# Altium PCB CuC_PCB.PcbDoc (part 2 of 4)
Units mm, origin at the board's own origin, x right, y up, seen from the top; angles counter-clockwise.
Board outline 203.71 x 204.22 mm, 2 copper layers (Top Layer, Bottom Layer); 421 components, 374 nets, 1366 pads, 155 vias.
Unrouted connection lines stored in the file: 2.
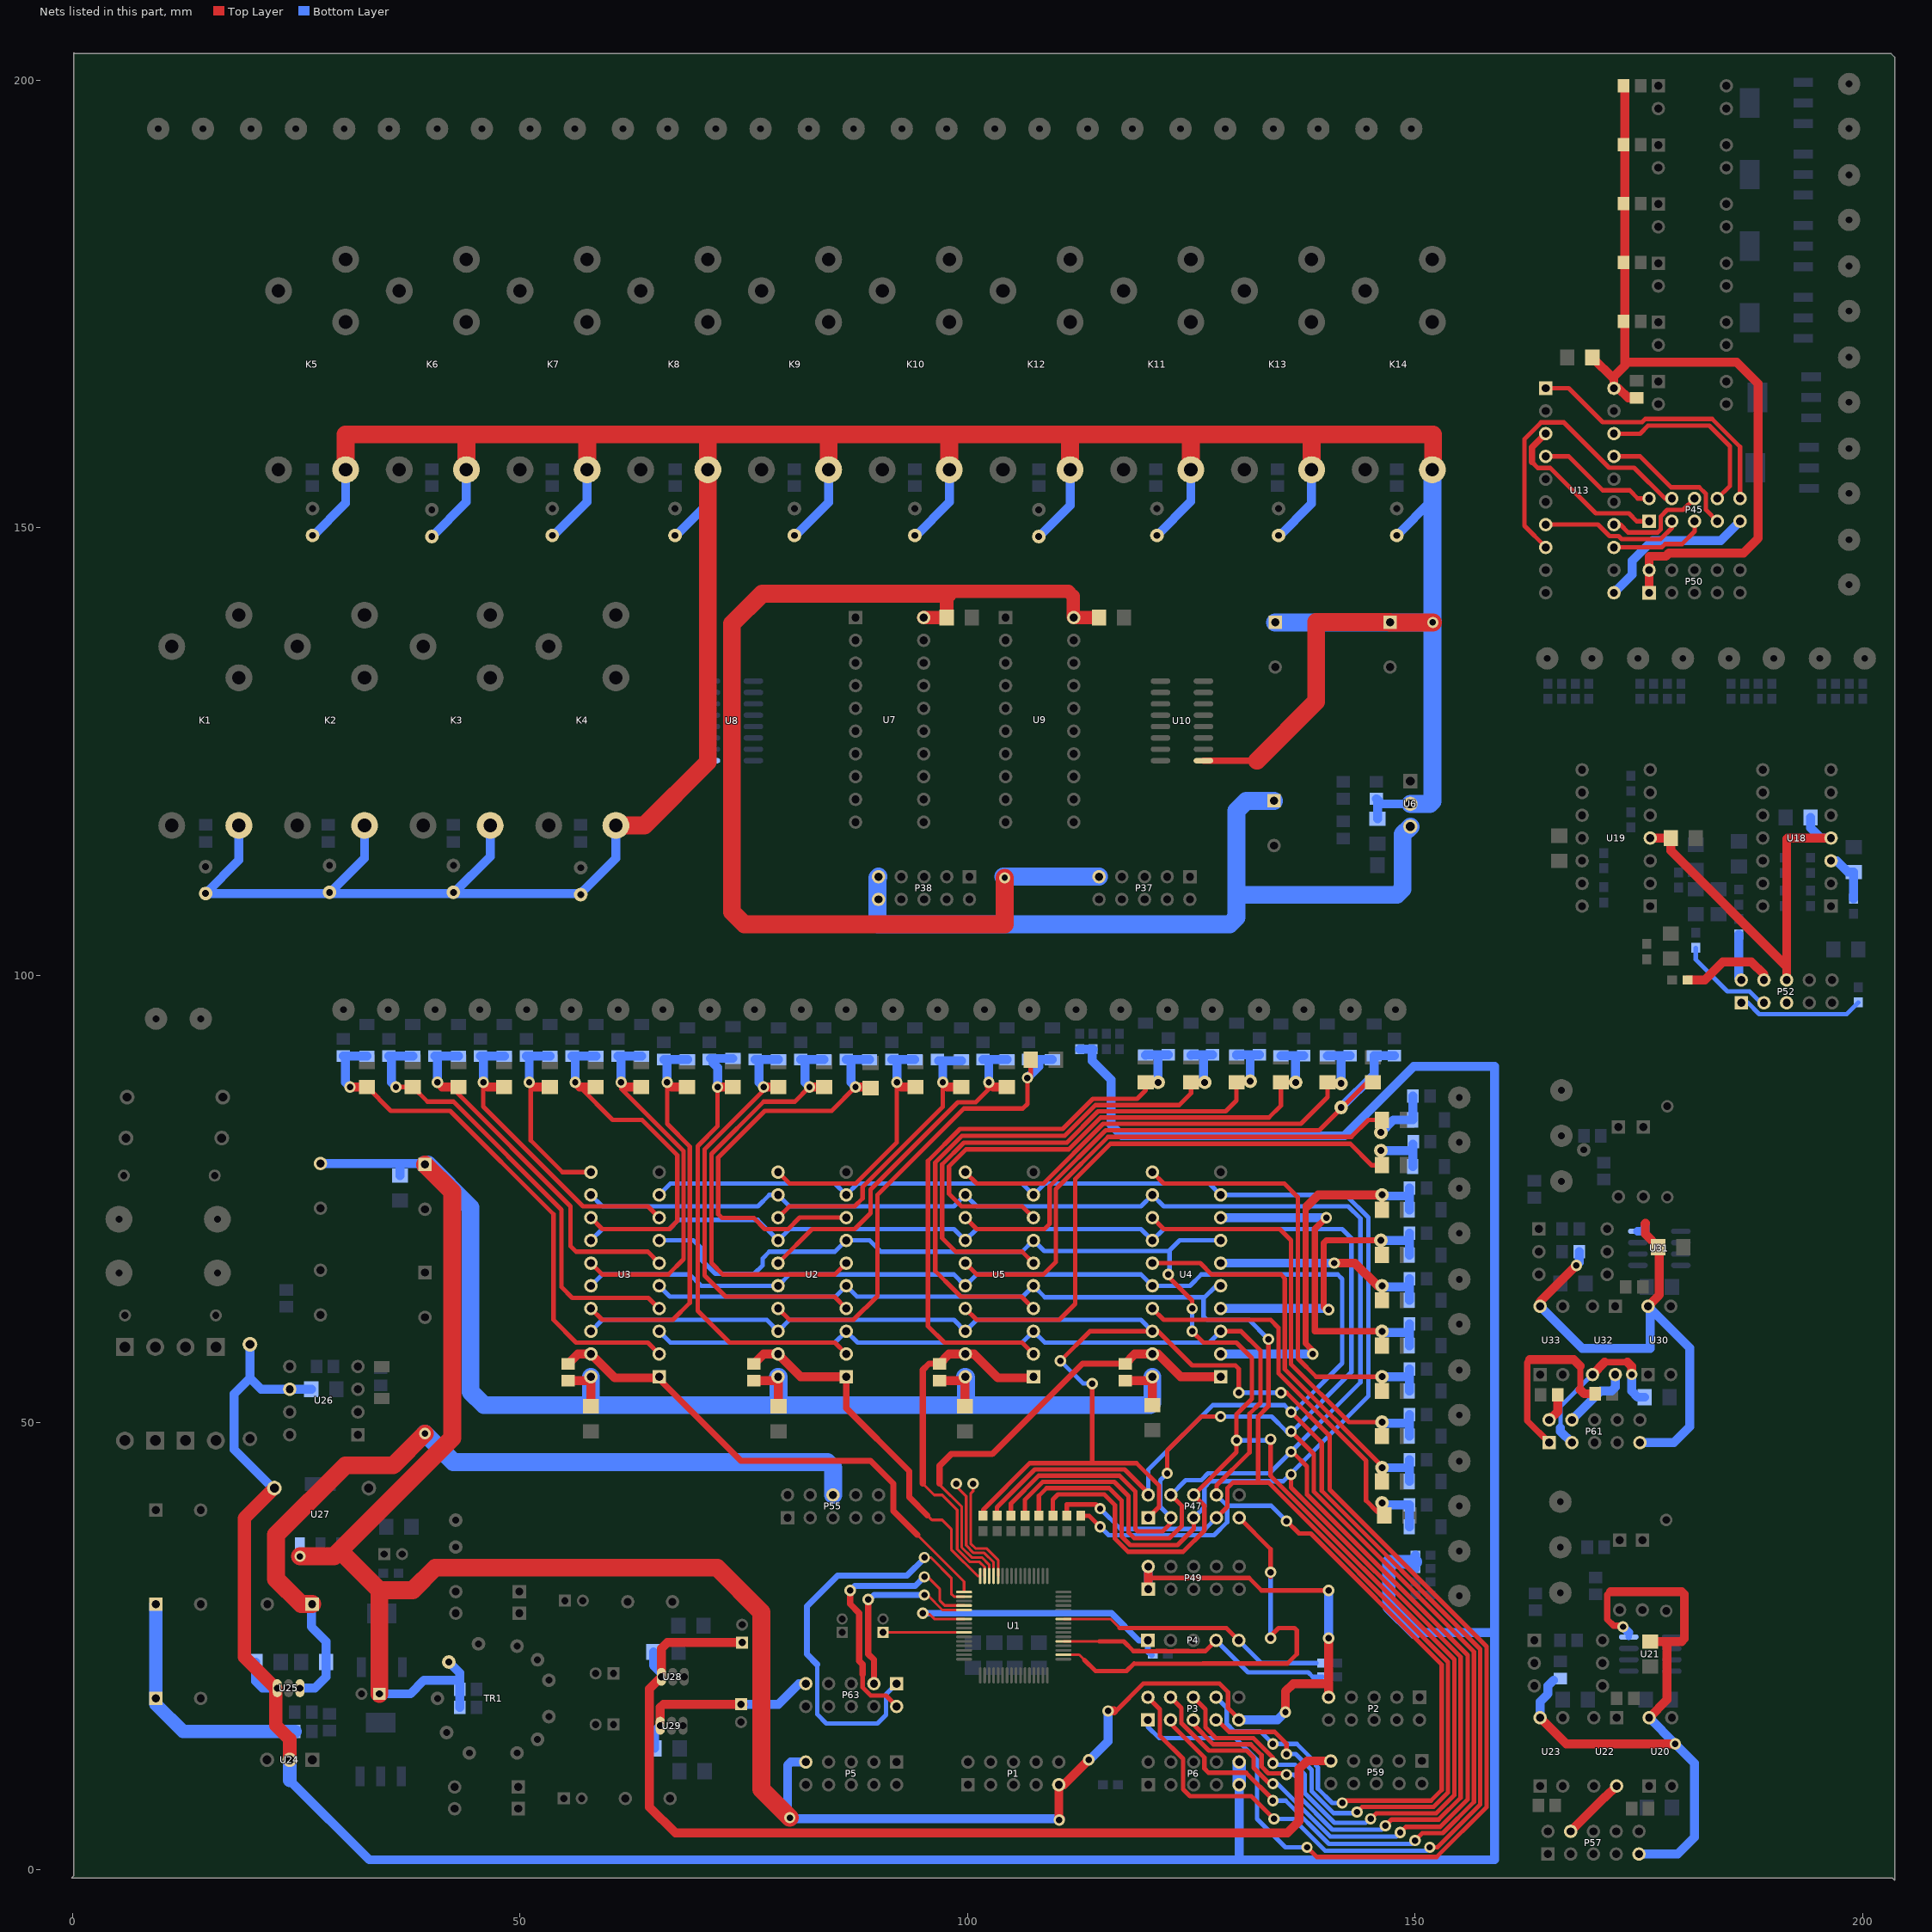
[diagram p2: the nets of this part, all layers, seen from the top]

## Via types
v1: diameter 1.27, hole 0.711, Top Layer to Bottom Layer, 155 vias

## Nets (pads, with @x,y where several pads share a name; then routed paths per layer and width w, separated by ;. In a path a pad name is that pad's centre, name@x,y a point inside that pad or via, vN(x,y) a via of type N, cw(c..) or ccw(c..) an arc to the next point about the centre after c; other vN are vias at no path point) (continued)
+3V3_CTRL: P61.4 U32.4 | length 7.8
  Bottom Layer w1: P61.4@167.513,50.292 170.764,53.543 171.928,53.543 172.36,53.975 U32.4@172.36,55.372
+3V3_RS: P57.4 U22.4 | length 7.2
  Top Layer w1: P57.4@167.386,4.318 171.196,8.128 171.238,8.128 U22.4@172.508,9.398
+5V: C7.1 C8.1 C25.1 C26.1 C71.1 C72.2 C77.1 L3.2 P1.9 P2.9 P3.9 P5.9 P49.1 P49.2 R13.2 R14.2 R39.2 R40.2 R134.1 R135.2 TR1.4 U2.20 U3.20 U4.20 U5.20 U27.3 | length 434.9
  Top Layer w0.5: 116.332,17.78 116.586,17.78 119.634,20.828 128.143,20.828 129.102,19.869 129.102,18.091 P3.9@130.429,16.764 ; 120.184,32.766 120.311,32.639 131.445,32.639 132.842,31.242 v1(140.335,31.242) v1@140.606,31.242
  Top Layer w1: R14.2@55.372,54.676 57.47,54.676 U3.20@57.912,55.118 C25.1@57.912,51.819 ; R13.2@76.115,54.676 78.383,54.676 U2.20@78.825,55.118 78.867,55.076 C26.1@78.867,51.819 ; R40.2@96.859,54.676 99.295,54.676 99.695,55.076 C8.1@99.695,51.819 ; v1(110.236,5.588) 110.363,5.715 110.194,5.884 P1.9@110.194,9.525 110.744,9.525 v1(113.538,12.319) ; v1(115.697,17.78) 116.332,17.78 ; R39.2@117.602,54.676 120.208,54.676 U4.20@120.65,55.118 C7.1@120.65,51.946 ; P49.1@120.184,31.369 120.184,32.766 P49.2@120.184,33.909 ; v1(135.509,17.653) 135.509,19.939 136.398,20.828 140.335,20.828 ; P2.9@140.335,19.304 140.335,20.828 ; v1@140.335,25.654 140.335,20.828
  Top Layer w2: v1(25.4,35.052) 29.21,35.052 42.418,48.26 42.418,75.779 C71.1@39.37,78.827 ; 30.48,35.052 34.274,31.258 ; C77.1@34.274,19.685 34.274,31.258 ; v1(80.137,5.842) 76.962,9.017 76.962,28.829 72.009,33.782 40.513,33.782 37.989,31.258 34.274,31.258
  Bottom Layer w1: L3.2@27.686,78.954 36.576,78.954 ; C77.1@34.274,19.685 37.719,19.685 39.243,21.209 43.246,21.209 ; C72.2@36.576,77.6 36.576,78.954 ; C71.1@39.37,78.827 39.243,78.954 36.576,78.954 ; TR1.4@42.037,23.241 43.246,22.032 43.246,21.209 ; R135.2@43.246,18.161 R134.1@43.246,20.193 43.246,21.209 ; P5.9@81.915,12.065 80.264,12.065 79.883,11.684 79.883,5.842 80.01,5.715 110.363,5.715 v1(110.236,5.588) ; v1(113.538,12.319) 113.626,12.319 115.697,14.39 v1(115.697,17.78) ; P49.1@120.184,31.369 P49.2@120.184,33.909 ; P3.9@130.302,16.764 134.62,16.764 v1(135.509,17.653) ; v1(140.335,25.908) v1(140.335,31.242)
  Bottom Layer w2: C71.1@39.37,78.827 39.664,78.827 44.45,74.041 44.45,53.467 45.974,51.943 57.912,51.943 ; U3.20@57.912,55.118 57.912,51.943 ; U2.20@78.825,55.118 78.867,55.076 78.867,51.943 ; U5.20@99.737,55.118 99.822,55.033 99.822,51.943 ; U4.20@120.65,55.118 120.65,52.197 120.396,51.943 99.822,51.943 ; 57.912,51.943 78.867,51.943 ; 78.867,51.943 99.822,51.943
+5V_CL: C84.2 C86.1 P63.9 U29.1 | length 22.2
  Top Layer w1: U29.1@65.659,16.129 65.659,18.161 66.024,18.526 C86.1@74.93,18.526
  Bottom Layer w1: C84.2@65.021,13.589 65.021,15.491 U29.1@65.659,16.129 ; C86.1@74.93,18.526 78.851,18.526 81.153,20.828 P63.9@81.915,20.828
+5V_CL2: C88.2 P61.9 R146.2 U30.4 U31.8 U33.4 | length 60.5
  Top Layer w1: U33.4@163.957,62.992 163.957,63.5 v1(168.021,67.564) ; 175.692,72.187 175.717,72.212 ; U30.4@176.022,62.992 177.292,64.262 177.292,69.466 C88.2@177.162,69.596 175.717,71.041 175.717,72.212 ; 175.717,72.212 175.768,72.263 175.717,72.263 175.717,72.212
  Bottom Layer w1: U33.4@163.957,62.992 168.656,58.293 176.276,58.293 U30.4@176.276,62.738 ; v1(168.021,67.564) 168.336,67.879 R146.2@168.336,69.088 ; U31.8@174.892,71.374 175.692,71.374 175.692,72.187 ; P61.9@175.133,47.752 178.892,47.752 180.67,49.53 180.67,58.344 U30.4@176.276,62.738 ; U30.4@176.022,62.992 U30.4@176.276,62.738
+5V_COM: C79.2 C81.1 P59.9 U28.1 | length 114.9
  Top Layer w1: C81.1@74.93,25.416 66.437,25.416 65.786,24.765 U28.1@65.786,21.59 64.459,20.263 64.459,7.042 67.359,4.142 135.714,4.142 137.033,5.461 137.033,11.303 137.922,12.192 P59.9@140.589,12.192
  Bottom Layer w1: C79.2@64.894,24.384 64.894,22.863 65.786,21.971 U28.1@65.786,21.59
+5V_DO: C50.1 P50.1 P50.2 R74.2 R75.2 R76.2 R77.2 R78.2 R79.2 U13.20 | length 91.1
  Top Layer w1: C50.1@169.802,169.001 172.212,166.591 ; R74.2@173.294,199.354 173.421,199.227 173.421,192.775 173.421,186.197 173.421,179.618 173.421,173.04 173.421,168.62 ; R79.2@174.752,164.495 173.797,164.495 172.72,165.572 U13.20@172.212,165.572 172.212,166.591 ; P50.1@176.149,142.712 P50.2@176.149,145.252 176.149,146.776 176.161,146.788 177.989,146.788 178.358,147.157 186.69,147.157 188.341,148.808 188.341,166.08 185.928,168.493 173.548,168.493 173.421,168.62 ; 172.212,166.591 172.212,166.903 173.421,168.112 173.421,168.62
+5V_O: C48.1 C49.1 P37.9 U7.20 U9.20 | length 129.7
  Top Layer w1.5: U7.20@95.096,139.954 C49.1@97.66,139.954 97.66,142.491 97.79,142.621 98.044,142.875 111.252,142.875 111.792,142.335 111.792,140.022 U9.20@111.86,139.954 C48.1@114.678,139.954
  Top Layer w2: 97.79,142.621 77.04,142.621 73.66,139.241 73.66,107.061 75.057,105.664 104.14,105.664 v1(104.14,110.871)
  Bottom Layer w2: v1(104.14,110.871) 104.013,110.998 P37.9@114.681,110.998
+5V_RS2: C61.2 P57.9 R122.2 U20.4 U21.8 U23.4 | length 77.1
  Top Layer w0.7: 171.831,31.115 171.475,30.759 171.475,28.003 172.174,27.305 v1@173.101,27.305
  Top Layer w1: U23.4@163.957,17.018 166.878,14.097 v1(179.07,14.097) ; 171.831,31.115 179.768,31.115 180.086,30.797 180.086,25.847 179.768,25.53 177.772,25.53 ; U20.4@176.149,17.018 178.156,19.025 178.156,25.146 177.772,25.53 ; C61.2@176.276,25.53 177.772,25.53
  Bottom Layer w0.7: U21.8@173.876,26.035 173.888,26.035 173.888,26.518
  Bottom Layer w1: U23.4@163.957,17.018 163.957,18.796 164.846,19.685 164.846,20.574 165.481,21.209 ; v1@173.177,27.229 173.888,26.518 ; P57.9@175.006,1.778 179.324,1.778 181.229,3.683 181.229,11.938 v1(179.07,14.097) U20.4@176.149,17.018
  other v1: 173.228,27.178
+12V_O: C45.2 C46.1 C47.1 D33.2 D34.2 D35.2 D36.2 D37.2 D38.2 D39.2 D40.2 D41.2 D42.2 D43.2 D44.2 D45.2 D46.2 K1.1 K2.1 K3.1 K4.1 K5.1 K6.1 K7.1 K8.1 K9.1 K10.1 K11.1 K12.1 K13.1 K14.1 R58.2 U6.2 U8.9 U10.9 | length 492
  Top Layer w0.7: U10.9@126.352,123.957 132.339,123.957
  Top Layer w2: K5.1@30.502,156.467 30.502,160.401 111.506,160.401 ; K6.1@43.994,156.467 43.994,160.326 ; K7.1@57.485,156.467 57.485,160.193 ; K4.1@60.699,116.716 63.884,116.716 70.976,123.808 K8.1@70.976,156.467 70.976,160.257 ; K9.1@84.467,156.467 84.467,160.389 ; K10.1@97.959,156.467 97.959,160.316 ; K12.1@111.45,156.467 111.45,160.345 111.506,160.401 ; K11.1@124.941,156.467 124.941,160.247 ; 132.339,123.957 138.938,130.556 138.938,139.446 141.351,139.446 ; K13.1@138.433,156.467 138.433,160.277 138.557,160.401 ; K14.1@151.924,156.467 152.019,156.562 152.019,160.401 138.557,160.401 ; v1(151.979,139.406) C46.1@147.193,139.406 ; 111.506,160.401 138.557,160.401 ; 141.351,139.446 C46.1@147.193,139.406 ; 141.351,139.446 147.153,139.446 C46.1@147.193,139.406
  Bottom Layer w1: K1.1@18.574,116.716 18.574,112.832 D33.2@14.859,109.117 D35.2@28.702,109.117 ; D37.2@26.797,148.995 30.502,152.7 K5.1@30.502,156.467 ; K2.1@32.616,116.716 32.616,113.031 28.765,109.18 D35.2@28.702,109.117 ; D38.2@40.132,148.995 43.994,152.857 K6.1@43.994,156.467 ; K3.1@46.657,116.716 46.657,113.229 42.608,109.18 D34.2@42.545,109.117 ; D39.2@53.594,148.995 53.657,149.058 57.485,152.886 K7.1@57.485,156.467 ; K4.1@60.699,116.716 60.699,113.047 56.769,109.117 D34.2@42.545,109.117 ; K4.1@60.96,116.586 63.627,116.586 70.998,123.957 U8.9@71.26,123.957 ; D40.2@67.31,148.995 67.373,149.058 70.976,152.661 K8.1@70.976,156.467 ; D41.2@80.645,148.995 80.709,149.058 84.467,152.817 K9.1@84.467,156.467 ; D42.2@94.107,148.995 97.959,152.847 K10.1@97.959,156.467 ; D43.2@107.95,148.995 111.45,152.495 K12.1@111.45,156.467 ; D44.2@121.031,148.995 D44.2@121.158,149.122 124.941,152.905 K11.1@124.941,156.467 ; D45.2@134.747,148.995 138.433,152.681 K13.1@138.433,156.467 ; R58.2@145.669,119.7 R58.2@145.796,119.573 ; C45.2@145.796,117.478 R58.2@145.796,119.573 ; D46.2@147.828,148.995 D46.2@147.955,149.122 151.924,153.091 ; U6.2@149.479,119.126 146.243,119.126 R58.2@145.796,119.573 ; D35.2@28.702,109.117 D34.2@42.545,109.117
  Bottom Layer w2: C47.1@134.366,139.406 C46.1@147.193,139.406 v1@151.924,139.406 ; U6.2@149.479,119.126 151.638,119.126 151.924,119.412 v1@151.924,139.425 ; K14.1@151.924,156.467 151.924,153.091 v1@151.924,139.425 ; v1(151.979,139.406) 152.019,139.446 v1@151.924,139.425
+15V: C65.1 C69.2 P55.6 U25.1 | length 94
  Top Layer w2: C65.1@26.757,29.718 25.527,29.718 22.733,32.512 22.733,37.465 30.48,45.212 35.814,45.212 v1(39.37,48.768)
  Bottom Layer w1: U25.1@25.4,20.32 27.051,20.32 28.324,21.593 C69.2@28.324,23.241 28.324,25.524 26.67,27.178 26.67,29.631 C65.1@26.757,29.718
  Bottom Layer w2: v1(39.37,48.768) 42.545,45.593 84.328,45.593 84.963,44.958 P55.6@84.963,41.91
+15V_AN: C55.1 C58.1 P52.6 U18.4 U19.4 | length 46.7
  Top Layer w1: U19.4@176.276,115.316 C58.1@178.559,115.316 178.559,113.922 191.516,100.965 ; P52.6@191.516,99.441 191.516,100.965 ; U18.4@196.469,115.316 191.643,115.316 191.516,115.189 191.516,100.965
  Bottom Layer w1: C55.1@194.186,117.602 194.186,116.456 195.326,115.316 U18.4@196.469,115.316
+24V: C63.1 C64.1 C66.2 C70.2 P6.9 P6.10 R31.2 R32.2 R33.2 R34.2 R125.1 R129.1 R130.1 U24.2 U25.3 U26.6 | length 421.1
  Top Layer w1.5: R129.1@22.538,42.672 19.177,39.311 19.177,23.823 22.68,20.32 22.68,16.182 24.257,14.605 U24.2@24.257,12.319
  Bottom Layer w1: R130.1@19.812,58.742 19.812,54.991 ; C66.2@20.444,23.241 20.444,21.085 21.209,20.32 U25.3@22.86,20.32 22.86,15.494 ; R129.1@22.538,42.672 22.352,42.672 18.034,46.99 18.034,53.213 19.812,54.991 ; 24.257,10.033 33.147,1.143 130.302,1.143 ; C70.2@26.667,53.721 U26.6@24.257,53.721 21.082,53.721 19.812,54.991 ; R31.2@112.522,91.733 R32.2@114.004,91.733 ; R32.2@113.919,91.733 113.919,90.424 116.014,88.328 116.014,83.248 117.221,82.042 142.113,82.042 149.86,89.789 158.877,89.789 158.877,1.143 130.344,1.143 P6.9@130.344,9.525 ; 149.987,26.543 158.877,26.543 ; R34.2@150.026,33.697 150.026,34.438 R33.2@150.026,35.179
  Bottom Layer w1.5: C63.1@9.311,29.718 C64.1@9.311,19.177 9.311,18.502 12.319,15.494 22.86,15.494 R125.1@24.831,15.494 24.257,14.92 U24.2@24.257,12.319 24.257,10.033 ; P6.9@130.344,9.525 P6.10@130.344,12.065 ; 149.987,26.543 147.066,29.464 147.066,34.417 147.087,34.438 150.026,34.438
+24V_O: C43.1 C44.2 P38.9 P38.10 U6.3 | length 88.6
  Bottom Layer w2: P38.9@90.043,110.998 89.916,110.871 89.916,105.664 129.286,105.664 130.048,106.426 130.048,108.966 ; C43.1@134.239,119.467 131.151,119.467 130.048,118.364 130.048,108.966 ; U6.3@149.479,116.586 148.593,115.7 C44.2@148.593,112.268 148.593,109.604 147.955,108.966 130.048,108.966
AN_PWM0: P52.1 R82.2 | length 14.1
  Bottom Layer w0.5: P52.1@186.436,96.901 187.203,96.901 188.457,95.647 198.224,95.647 R82.2@199.517,96.94
AN_PWM1: P52.2 R90.2 | length 5.2
  Bottom Layer w1: R90.2@186.182,104.56 186.182,99.695 P52.2@186.436,99.441
AN_PWM2: P52.3 R98.2 | length 10.9
  Bottom Layer w0.5: R98.2@181.356,103.036 181.356,101.727 184.896,98.187 187.363,98.187 188.649,96.901 P52.3@188.976,96.901
AN_PWM3: P52.4 R106.2 | length 10.6
  Top Layer w1: R106.2@180.428,99.441 182.372,99.441 184.404,101.473 187.579,101.473 188.976,100.076 P52.4@188.976,99.441
AN_PWM4: P52.5
CTRL_DATA_DIR: P63.1 U1.2 | length 48
  Top Layer w0.3: v1@95.25,34.925 95.885,34.925 98.171,32.639 98.171,30.861 98.477,30.555 U1.2@99.606,30.555
  Bottom Layer w0.5: 83.185,22.987 83.185,17.399 84.201,16.383 89.916,16.383 90.875,17.342 90.875,19.628 P63.1@92.075,20.828
  Bottom Layer w0.7: 83.185,22.987 82.042,24.13 82.042,29.464 85.471,32.893 93.218,32.893 95.25,34.925 v1@95.25,35.179
  other v1: 95.165,34.925
CTRL_DATA_DIR2: P61.1 R136.2 | length 20.8
  Top Layer w0.7: 162.814,57.023 162.525,56.734 162.525,50.2 P61.1@164.973,47.752 ; 168.453,53.657 168.453,56.312
  Top Layer w1: 162.814,57.023 167.742,57.023 168.453,56.312 ; 168.453,53.657 168.897,53.213 R136.2@170.119,53.213
CTRL_RX: P63.3 U1.5 | length 21
  Top Layer w0.3: v1(95.165,30.734) 95.504,30.734 97.183,29.055 U1.5@99.606,29.055
  Top Layer w0.7: v1(88.9,30.226) 88.9,24.13 89.535,23.495 P63.3@89.535,20.828
  Bottom Layer w0.7: v1@89.154,30.353 89.535,30.734 v1(95.165,30.734)
CTRL_RX2: P61.3 R140.1 U32.3 | length 19.3
  Top Layer w0.7: 171.191,56.744 173.736,56.744
  Top Layer w1: U32.3@169.82,55.372 171.191,56.744 ; 173.736,56.744 174.193,56.286 v1(174.193,55.372)
  Bottom Layer w0.5: 166.243,49.403 166.243,51.795 U32.3@169.82,55.372
  Bottom Layer w1: 166.243,49.403 166.243,49.022 P61.3@167.513,47.752 ; v1(174.193,55.372) 174.193,53.518 174.879,52.832 R140.1@175.638,52.832
CTRL_TX: P63.2 U1.4 | length 31.5
  Top Layer w0.3: v1(95.165,32.766) 95.504,32.766 96.901,31.369 96.901,30.099 97.445,29.555 U1.4@99.606,29.555
  Top Layer w0.5: 88.265,21.844 88.265,20.401 89.178,19.488 90.875,19.488 P63.2@92.075,18.288
  Top Layer w0.7: v1(86.868,31.242) 86.868,29.718 87.884,28.702 87.884,23.368 88.265,22.987 88.265,21.844
  Bottom Layer w0.7: v1(86.868,31.242) 87.376,31.75 94.149,31.75 v1(95.165,32.766)
CTRL_TX2: P61.2 R143.2 | length 3.2
  Top Layer w1: P61.2@164.973,50.292 165.923,51.242 R143.2@165.923,53.086
DATA0: P3.1 P47.1 R3.2 U2.18 U3.18 U4.18 U5.18 | length 244.4
  Top Layer w0.5: R3.2@101.727,39.585 101.727,40.259 106.934,45.466 113.919,45.466 ; v1(110.363,56.896) 113.665,60.198 U4.18@120.65,60.198 121.285,60.198 125.095,56.388 129.921,56.388 130.302,56.007 v1(130.302,53.34) ; v1(113.919,54.356) 113.919,45.466 ; P47.1@120.184,39.37 121.384,40.57 121.384,42.954 118.872,45.466 113.919,45.466 ; v1(135.001,53.34) 135.636,53.34 140.462,48.514 140.462,42.493 157.981,24.974 157.981,7.033 152.403,1.455 139.007,1.455 v1(137.922,2.54)
  Bottom Layer w0.5: U3.18@57.912,60.198 59.182,61.468 77.555,61.468 U2.18@78.825,60.198 80.095,61.468 98.467,61.468 U5.18@99.737,60.198 101.007,61.468 119.38,61.468 U4.18@120.65,60.198 ; v1(110.363,56.896) 112.903,54.356 v1(113.919,54.356) ; P3.1@120.142,16.764 120.142,16.002 121.412,14.732 129.921,14.732 132.334,12.319 132.334,5.715 135.509,2.54 v1(137.922,2.54) ; v1(130.302,53.34) v1(135.001,53.34)
DATA1: P3.2 P47.2 R4.2 U2.16 U3.16 U4.16 U5.16 | length 250.9
  Top Layer w0.5: R4.2@103.287,39.585 103.287,40.549 107.504,44.766 117.54,44.766 120.184,42.122 P47.2@120.184,41.91 ; P3.2@120.142,19.304 121.482,17.964 121.482,15.004 124.064,12.422 124.064,9.028 124.837,8.255 131.699,8.255 v1(134.239,5.715) ; v1(136.144,51.181) 139.573,47.752 139.573,42.392 157.281,24.684 157.281,7.323 152.498,2.54 v1(151.638,2.54)
  Bottom Layer w0.5: U3.16@57.912,65.278 59.182,66.548 68.961,66.548 70.231,65.278 U2.16@78.825,65.278 80.095,66.548 98.467,66.548 U5.16@99.737,65.278 101.007,66.548 119.38,66.548 U4.16@120.65,65.278 124.841,65.278 126.111,66.548 141.351,66.548 141.859,66.04 141.859,56.642 136.398,51.181 v1(136.144,51.181) 135.382,51.943 127.381,51.943 120.184,44.746 P47.2@120.184,41.91 ; v1(134.239,5.715) 136.398,5.715 139.954,2.159 151.257,2.159 v1(151.638,2.54)
DATA2: P3.3 P47.3 R5.2 U2.14 U3.14 U4.14 U5.14 | length 257.6
  Top Layer w0.5: R5.2@104.848,39.585 104.848,40.967 107.947,44.066 116.97,44.066 118.745,42.291 118.745,38.1 118.999,37.846 121.793,37.846 122.724,38.777 P47.3@122.724,39.37 ; v1(122.301,44.323) 122.301,46.863 126.111,50.673 v1@128.143,50.673 ; P3.3@122.682,16.764 122.682,16.344 126.464,12.562 126.464,11.331 126.93,10.865 131.121,10.865 v1@134.175,7.81 ; v1(136.144,49.022) 138.684,46.482 138.684,42.291 156.581,24.394 156.581,7.613 153.094,4.126 150.811,4.126 v1(149.987,3.302)
  Bottom Layer w0.5: U3.14@57.912,70.358 59.182,71.628 66.675,71.628 67.691,72.644 76.539,72.644 U2.14@78.825,70.358 80.095,71.628 98.467,71.628 U5.14@99.737,70.358 101.007,71.628 119.38,71.628 U4.14@120.65,70.358 121.92,71.628 141.856,71.628 142.875,70.609 142.875,55.626 136.271,49.022 v1(136.144,49.022) 135.636,49.022 133.985,50.673 v1(128.27,50.673) ; v1@122.237,44.259 121.524,43.546 121.524,40.57 P47.3@122.724,39.37 ; v1(134.112,7.747) 135.535,7.747 140.361,2.921 149.606,2.921 v1(149.987,3.302)
DATA3: P3.4 P47.4 R7.2 U2.12 U3.12 U4.12 U5.12 | length 254.6
  Top Layer w0.5: R7.2@106.408,39.585 106.408,41.384 108.39,43.366 116.4,43.366 117.983,41.783 117.983,37.719 118.618,37.084 122.555,37.084 123.924,38.453 123.924,40.71 P47.4@122.724,41.91 ; P3.4@122.682,19.304 123.882,18.104 123.882,16.407 126.954,13.335 131.191,13.335 131.953,12.573 131.953,11.43 133.731,9.652 v1(134.112,9.652) ; v1@136.398,46.609 137.922,45.085 137.922,41.962 155.881,24.004 155.881,7.903 152.804,4.826 148.971,4.826 v1(148.336,4.191)
  Bottom Layer w0.5: U3.12@57.912,75.438 59.182,74.168 76.581,74.168 77.851,75.438 U2.12@78.825,75.438 80.095,74.168 98.467,74.168 U5.12@99.737,75.438 101.007,74.168 119.38,74.168 U4.12@120.65,75.438 121.92,74.168 142.53,74.168 143.891,72.807 143.891,54.483 v1(136.144,46.736) 133.731,44.323 126.873,44.323 126.111,43.561 124.375,43.561 P47.4@122.724,41.91 P47.4@122.936,41.91 ; v1(134.112,9.652) 134.62,9.652 140.527,3.745 147.89,3.745 v1(148.336,4.191)
DATA4: P3.5 P47.5 R8.2 U2.9 U3.9 U4.9 U5.9 | length 239.2
  Top Layer w0.5: R8.2@107.968,39.585 107.968,41.801 108.833,42.666 115.827,42.666 117.221,41.272 117.221,37.263 118.162,36.322 123.444,36.322 125.264,38.142 P47.5@125.264,39.37 ; P3.5@125.222,16.764 125.222,16.282 127.469,14.035 131.65,14.035 132.842,12.843 132.842,11.557 133.604,10.795 135.509,10.795 v1(135.636,10.668) ; v1(136.144,44.196) 136.144,42.75 155.077,23.817 155.077,8.089 152.635,5.647 147.379,5.647 v1(146.685,4.953)
  Bottom Layer w0.5: U3.9@65.532,75.438 66.802,76.708 85.175,76.708 U2.9@86.445,75.438 87.715,76.708 106.087,76.708 U5.9@107.357,75.438 108.627,76.708 127,76.708 U4.9@128.27,75.438 142.25,75.438 144.78,72.908 144.78,52.959 135.255,43.434 127.127,43.434 126.464,42.771 126.464,40.57 P47.5@125.264,39.37 ; v1(135.636,10.668) 136.46,10.668 136.968,10.16 136.968,8.294 140.755,4.507 146.239,4.507 v1(146.685,4.953)
DATA5: P3.6 P47.6 R9.2 U2.7 U3.7 U4.7 U5.7 | length 224.5
  Top Layer w0.5: R9.2@109.528,39.585 109.528,41.388 110.106,41.966 115.26,41.966 116.459,40.767 116.459,37.035 117.934,35.56 124.079,35.56 126.464,37.945 126.464,40.71 P47.6@125.264,41.91 130.048,46.694 130.048,50.927 131.761,52.64 131.761,57.215 130.048,58.928 126.365,58.928 v1(125.095,60.198) ; v1(122.428,66.548) 122.301,66.675 122.301,66.421 125.095,63.627 v1@125.095,62.992 ; P3.6@125.222,19.304 126.562,17.964 126.562,15.932 127.759,14.735 131.94,14.735 134.112,12.563 v1(134.112,11.938) ; v1(133.858,48.133) 133.858,44.046 154.377,23.527 154.377,8.379 152.345,6.347 145.666,6.347 v1(145.034,5.715)
  Bottom Layer w0.5: U3.7@65.532,70.358 69.342,70.358 70.358,69.342 70.358,68.072 71.812,66.618 76.143,66.618 77.089,67.564 77.089,68.326 77.851,69.088 85.175,69.088 U2.7@86.445,70.358 89.027,70.358 90.297,69.088 106.087,69.088 U5.7@107.357,70.358 108.557,69.158 122.301,69.158 ; v1@122.301,66.675 122.555,66.421 122.555,69.215 123.698,70.358 U4.7@128.27,70.358 ; v1(125.095,60.198) v1(125.095,62.738) ; v1(130.048,48.006) v1@133.35,48.006 ; v1(134.112,11.938) 134.297,11.753 136.583,11.753 137.668,10.668 137.668,8.584 140.983,5.269 144.464,5.269
DATA6: P3.7 P47.7 R10.2 U2.5 U3.5 U4.5 U5.5 | length 197.2
  Top Layer w0.5: R10.2@111.089,39.585 111.089,40.858 114.336,40.858 v1(114.808,40.386) ; P3.7@127.762,16.764 127.889,16.764 129.218,15.435 134.308,15.435 135.636,14.107 v1(135.636,12.954) ; P47.7@127.804,39.37 129.032,40.598 129.032,42.672 129.667,43.307 133.607,43.307 153.677,23.237 153.677,8.669 152.055,7.047 144.08,7.047 v1(143.51,6.477) ; 132.461,43.307 132.461,50.673 133.604,51.816 v1(133.604,59.309)
  Bottom Layer w0.5: U3.5@65.532,65.278 66.732,64.078 85.245,64.078 U2.5@86.445,65.278 87.645,64.078 106.157,64.078 U5.5@107.357,65.278 108.627,64.008 126.365,64.008 126.365,61.849 126.746,61.468 131.445,61.468 v1(133.604,59.309) ; v1(114.808,40.386) 117.084,38.11 126.544,38.11 P47.7@127.804,39.37 ; 126.365,63.881 127.762,65.278 U4.5@128.27,65.278 ; v1(135.636,12.954) 136.652,12.954 138.43,11.176 138.43,8.812 140.892,6.35 v1@143.51,6.35
DATA7: P3.8 P47.8 R11.2 U2.3 U3.3 U4.3 U5.3 | length 189.4
  Top Layer w0.5: R11.2@112.649,39.585 113.577,39.585 v1(114.808,38.354) ; P47.8@127.804,41.91 127.831,41.937 127.831,42.995 131.494,46.658 131.494,50.976 132.715,52.197 132.715,58.039 130.556,60.198 U4.3@128.27,60.198 ; v1(135.636,38.989) 137.033,37.592 138.332,37.592 152.977,22.947 152.977,8.959 151.765,7.747 142.113,7.747 v1(141.859,7.493)
  Bottom Layer w0.5: U3.3@65.532,60.198 66.802,58.928 85.175,58.928 U2.3@86.445,60.198 87.715,58.928 106.087,58.928 U5.3@107.357,60.198 108.627,58.928 127,58.928 U4.3@128.27,60.198 ; v1(114.808,38.354) 115.752,37.41 127.541,37.41 129.004,38.873 129.004,40.71 ; P3.8@127.762,19.304 128.962,18.104 128.962,16.326 129.795,15.493 132.716,15.493 v1(134.112,14.097) 136.779,14.097 138.938,11.938 138.938,11.658 139.13,11.466 139.13,9.102 140.739,7.493 v1(141.859,7.493) ; P47.8@127.804,41.91 129.004,40.71 ; v1(135.636,38.989) 133.915,40.71 129.004,40.71
DO_DATA0: P45.1 U13.3 | length 19.6
  Top Layer w0.5: 163.068,157.317 163.719,156.666 165.111,156.666 170.191,151.586 173.879,151.586 174.752,150.713 P45.1@176.149,150.713
  Top Layer w0.7: 163.068,157.317 163.068,158.968 U13.3@164.592,160.492
DO_DATA1: P45.2 U13.4 | length 13.5
  Top Layer w0.5: U13.4@164.592,157.952 167.164,157.952 170.958,154.158 173.974,154.158 174.879,153.253 P45.2@176.149,153.253
DO_DATA2: P45.3 U13.7 | length 16
  Top Layer w0.5: U13.7@164.592,150.332 170.439,150.332 171.725,149.046 172.731,149.046 173.072,148.705 177.42,148.705 178.689,149.974 P45.3@178.689,150.713
DO_DATA3: P45.4 U13.8 | length 33.8
  Top Layer w0.5: U13.8@164.592,147.792 164.592,147.824 162.214,150.202 162.214,159.887 164.073,161.746 166.645,161.746 171.693,156.698 174.477,156.698 177.922,153.253 P45.4@178.689,153.253
DO_DATA4: P45.5 U13.13 | length 10.9
  Top Layer w0.5: U13.13@172.212,147.792 177.573,147.792 177.942,148.161 179.82,148.161 181.229,149.57 P45.5@181.229,150.713
DO_DATA5: P45.6 U13.14 | length 11.8
  Top Layer w0.5: U13.14@172.212,150.332 172.919,150.332 173.792,149.459 177.108,149.459 177.435,149.786 177.435,151.232 178.17,151.967 179.943,151.967 P45.6@181.229,153.253
DO_DATA6: P45.7 U13.17 | length 15.6
  Top Layer w0.5: U13.17@172.212,157.952 175.144,157.952 178.589,154.507 181.748,154.507 182.483,153.772 182.483,151.999 P45.7@183.769,150.713
DO_DATA7: P45.8 U13.18 | length 20.7
  Top Layer w0.5: U13.18@172.212,160.492 175.133,160.492 176.022,161.381 182.88,161.381 185.166,159.095 185.166,154.65 P45.8@183.769,153.253
DO_DOUT_CLK: P45.9 U13.11 | length 18.3
  Bottom Layer w1: U13.11@172.212,142.712 174.244,144.744 174.244,146.268 176.53,148.554 184.15,148.554 P45.9@186.309,150.713
DO_OUTPUT_ENABLE: P45.10 U13.1 | length 30.5
  Top Layer w0.5: U13.1@164.592,165.572 167.164,165.572 170.958,161.778 175.353,161.778 175.71,162.135 183.192,162.135 186.309,159.018 P45.10@186.309,153.253
DOUT_CLK: P47.9 U1.34 | length 48.8
  Top Layer w0.3: U1.34@110.706,24.055 112.47,24.055 113.03,23.495
  Top Layer w0.5: 113.03,23.495 114.3,22.225 117.752,22.225 118.598,23.071 118.609,23.071 118.626,23.054 123.759,23.054 123.768,23.063 124.136,23.063 124.145,23.054 126.299,23.054 126.316,23.071 135.72,23.071 136.779,24.13 136.779,26.797 136.525,27.051 134.747,27.051 v1@134.112,26.416 ; P47.9@130.344,39.37 133.858,35.856 v1@133.858,32.766
  Bottom Layer w0.5: v1@133.858,26.035 v1@133.858,33.401
  other v1: 133.858,25.908 133.858,33.274
ICSP_PGC: P4.5 R1.2 U1.42 | length 30.3
  Top Layer w0.3: U1.42@110.706,28.055 115.963,28.055 116.967,27.051
  Top Layer w0.5: 116.967,27.051 128.905,27.051 P4.5@130.302,25.654
  Bottom Layer w0.5: P4.5@130.302,25.654 132.842,23.114 138.977,23.114
ICSP_PGD: P4.4 R2.2 U1.37 | length 31.6
  Top Layer w0.3: U1.37@110.706,25.555 114.709,25.555
  Top Layer w0.5: 114.709,25.555 117.447,25.555 118.531,24.471 119.189,24.471 119.206,24.454 121.078,24.454 121.087,24.463 122.176,24.463 122.185,24.454 123.179,24.454 123.188,24.463 124.716,24.463 124.725,24.454 125.719,24.454 125.736,24.471 126.579,24.471 P4.4@127.762,25.654
  Bottom Layer w0.5: P4.4@127.762,25.654 131.318,22.098 138.049,22.098 138.557,21.59 R2.2@139.612,21.59
ICSP_VPP: P4.1 R12.1 U1.7 | length 33
  Top Layer w0.3: v1@95.08,28.575 95.758,28.575 96.278,28.055 U1.7@99.606,28.055
  Bottom Layer w0.7: v1(94.996,28.702) 116.078,28.702 119.126,25.654 P4.1@120.142,25.654 120.142,24.423 R12.1@120.562,24.003
INPUT_1_8: R14.1 U1.1 U3.1 U3.19 | length 58.3
  Top Layer w0.3: 94.361,37.465 99.606,32.22 U1.1@99.606,31.055
  Top Layer w0.7: U3.1@65.405,54.991 74.676,45.72 89.154,45.72 91.694,43.18 91.694,40.132 94.361,37.465
  Top Layer w1: R14.1@55.372,56.576 56.454,57.658 U3.19@57.912,57.658 60.579,54.991 65.405,54.991 U3.1@65.532,55.118
INPUT_9_16: R13.1 U1.64 U2.1 U2.19 | length 41.1
  Top Layer w0.3: 95.504,39.624 96.012,39.116 97.155,39.116 98.171,38.1 98.171,35.814 101.13,32.855 U1.64@101.406,32.855
  Top Layer w0.7: U2.1@86.445,55.118 86.445,51.604 93.472,44.577 93.472,41.656 95.504,39.624
  Top Layer w1: R13.1@76.115,56.576 77.197,57.658 U2.19@78.825,57.658 81.365,55.118 U2.1@86.445,55.118
INPUT_17_24: R40.1 U1.63 U5.1 U5.19 | length 41.3
  Top Layer w0.3: 94.996,43.172 96.258,41.91 97.155,41.91 98.838,40.227 98.838,35.854 100.275,34.417 101.346,34.417 101.906,33.857 U1.63@101.906,32.855
  Top Layer w0.7: 94.996,43.172 94.996,55.88 95.692,56.576 R40.1@96.859,56.576
  Top Layer w1: R40.1@96.859,56.576 97.941,57.658 U5.19@99.737,57.658 100.711,57.658 103.378,54.991 107.23,54.991 U5.1@107.357,55.118
INPUT_25_32: R39.1 U1.62 U4.1 U4.19 | length 52.7
  Top Layer w0.3: 96.977,42.977 99.338,40.616 99.338,36.061 100.466,34.933 101.592,34.933 102.406,34.119 U1.62@102.406,32.855
  Top Layer w0.7: 96.869,43.172 96.869,45.18 98.171,46.482 102.743,46.482 112.837,56.576 R39.1@117.602,56.576
  Top Layer w1: R39.1@117.602,56.576 118.684,57.658 U4.19@120.65,57.658 121.285,57.658 123.825,55.118 U4.1@128.27,55.118
INPUT_33_40: U1.61 | length 12.7
  Top Layer w0.3: v1(98.742,43.172) 98.742,42.862 99.838,41.767 99.838,36.268 100.673,35.433 101.854,35.433 102.906,34.381 U1.61@102.906,32.855
INPUT_41_48: U1.60 | length 12.4
  Top Layer w0.3: v1(100.616,43.172) 100.616,42.323 100.338,42.045 100.338,36.475 100.872,35.941 102.108,35.941 103.406,34.643 U1.60@103.406,32.855
NetC1_1: C1.1 U1.10 | length 9.1
  Top Layer w0.3: C1.1@90.551,26.555 U1.10@99.606,26.555
NetC9_1: C9.1 D9.2 R29.2 U2.17 | length 55.3
  Top Layer w0.5: U2.17@78.825,62.738 80.095,61.468 87.249,61.468 89.916,64.135 89.916,75.438 99.568,85.09 106.172,85.09 106.68,85.598 106.68,88.268 107.058,88.646 C9.1@107.058,90.551
  Bottom Layer w1: v1(106.68,88.519) 107.95,89.789 107.95,90.554 ; R29.2@106.825,90.579 106.85,90.554 107.95,90.554 ; D9.2@109.474,90.554 107.95,90.554
NetC10_1: C10.1 D10.2 R27.2 U2.15 | length 40.6
  Top Layer w0.5: U2.15@78.994,67.691 78.994,67.987 82.635,71.628 87.376,71.628 89.154,73.406 89.154,76.047 98.897,85.79 100.903,85.79 102.362,87.249 v1@102.362,87.63
  Top Layer w1: v1@102.362,87.63 v1(102.362,88.011) ; 102.873,87.5 C10.1@104.394,87.5
  Bottom Layer w1: R27.2@101.728,90.579 101.753,90.554 D10.2@104.394,90.554 ; v1(102.362,88.011) R27.2@102.362,90.427
NetC11_1: C11.1 D11.2 R25.2 U2.13 | length 33.1
  Top Layer w0.5: U2.13@78.825,72.898 80.095,74.168 87.376,74.168 88.262,75.054 88.262,76.324 97.228,85.29 v1(97.228,88.011)
  Top Layer w1: 97.739,87.5 C11.1@99.287,87.5
  Bottom Layer w1: R25.2@96.783,90.427 D11.2@99.314,90.427 ; v1(97.228,88.011) R25.2@97.228,89.983
NetC12_1: C12.1 D12.2 R23.2 U2.11 | length 28.6
  Top Layer w0.5: U2.11@78.825,77.978 80.095,76.708 87.503,76.708 92.093,81.298 v1(92.093,88.011)
  Top Layer w1: 92.604,87.5 C12.1@94.18,87.5
  Bottom Layer w1: R23.2@91.534,90.579 91.559,90.554 D12.2@94.107,90.554 ; v1(92.093,88.011) R23.2@92.093,90.02
NetC13_1: C13.1 D13.2 R21.2 U2.8 | length 47.4
  Top Layer w0.5: U2.8@86.445,72.898 81.225,72.898 79.955,71.628 77.343,71.628 76.116,72.855 72.56,72.855 72.136,73.279 72.136,79.629 77.343,84.836 84.806,84.836 v1(87.47,87.5)
  Top Layer w1: v1(87.47,87.5) C13.1@89.072,87.5
  Bottom Layer w1: R21.2@86.437,90.579 86.462,90.554 D13.2@89.027,90.554 ; R21.2@86.959,90.057 86.959,88.011 v1(87.47,87.5)
NetC14_1: C14.1 D14.2 R19.2 U2.6 | length 49.4
  Top Layer w0.5: v1(82.335,87.5) 80.687,85.852 77.216,85.852 71.374,80.01 71.374,67.818 72.644,66.548 85.175,66.548 U2.6@86.445,67.818
  Top Layer w1: v1(82.335,87.5) C14.1@83.965,87.5
  Bottom Layer w1: R19.2@81.34,90.579 81.365,90.554 D14.2@83.947,90.554 ; R19.2@81.824,90.094 81.824,88.011 v1(82.335,87.5)
NetC15_1: C15.1 D15.2 R17.2 U2.4 | length 48.3
  Top Layer w0.5: v1(77.201,87.5) 77.201,87.107 70.612,80.518 70.612,66.421 72.955,64.078 85.105,64.078 U2.4@86.445,62.738
  Top Layer w1: v1(77.201,87.5) C15.1@78.858,87.5
  Bottom Layer w1: R17.2@76.243,90.579 76.268,90.554 D15.2@78.867,90.554 ; R17.2@76.69,90.132 76.69,88.011 v1(77.201,87.5)
NetC16_1: C16.1 D16.2 R15.2 U2.2 | length 51.6
  Top Layer w0.5: v1(72.066,87.5) 72.066,83.115 69.85,80.899 69.85,62.484 73.406,58.928 85.175,58.928 U2.2@86.445,57.658
  Top Layer w1: v1(72.066,87.5) C16.1@73.751,87.5
  Bottom Layer w1: R15.2@71.247,90.681 D16.2@73.787,90.681 ; R15.2@71.555,90.169 72.066,89.658 v1(72.066,87.5)
NetC17_1: C17.1 D1.2 R16.2 U3.2 | length 60.3
  Top Layer w0.5: C17.1@32.893,87.5 35.557,84.836 42.164,84.836 53.721,73.279 53.721,61.468 56.261,58.928 64.262,58.928 U3.2@65.532,57.658
  Top Layer w1: v1(30.991,87.5) C17.1@32.893,87.5
  Bottom Layer w1: v1(30.991,87.5) 30.48,88.011 30.48,90.706 R16.2@30.226,90.96 32.86,90.96 D1.2@32.885,90.935
NetC18_1: C18.1 D2.2 R18.2 U3.4 | length 50.8
  Top Layer w0.5: v1(36.125,87.5) C18.1@38,87.5 39.648,85.852 42.545,85.852 54.61,73.787 54.61,65.151 55.823,63.938 64.332,63.938 U3.4@65.532,62.738
  Bottom Layer w1: R18.2@35.343,90.96 35.368,90.935 D2.2@38.002,90.935 ; R18.2@35.614,90.689 35.614,88.011 v1(36.125,87.5)
NetC19_1: C19.1 D3.2 R20.2 U3.6 | length 42.9
  Top Layer w0.5: v1(40.749,88.011) 41.26,87.5 42.294,87.5 55.626,74.168 55.626,69.723 56.261,69.088 64.262,69.088 U3.6@65.532,67.818
  Top Layer w1: 41.26,87.5 C19.1@43.107,87.5
  Bottom Layer w1: R20.2@40.461,90.96 40.486,90.935 D3.2@43.12,90.935 ; v1(40.749,88.011) R20.2@40.749,90.672
NetC20_1: C20.1 D4.2 R22.2 U3.8 | length 35.3
  Top Layer w0.5: 46.394,87.5 v1(45.883,88.011) 45.883,85.308 57.023,74.168 64.262,74.168 U3.8@65.532,72.898
  Top Layer w1: 46.394,87.5 C20.1@48.215,87.5
  Bottom Layer w1: R22.2@45.578,90.96 45.603,90.935 D4.2@48.237,90.935 ; v1(45.883,88.011) R22.2@45.883,90.655
NetC21_1: C21.1 D5.2 R24.2 U3.11 | length 22.1
  Top Layer w0.5: v1(51.018,88.011) 51.529,87.5 51.181,87.152 51.181,81.534 54.737,77.978 U3.11@57.912,77.978
  Top Layer w1: 51.529,87.5 C21.1@53.322,87.5
  Bottom Layer w1: R24.2@50.696,90.96 50.721,90.935 D5.2@53.355,90.935 ; v1(51.018,88.011) R24.2@51.018,90.638
NetC22_1: C22.1 D6.2 R26.2 U3.13 | length 39.7
  Top Layer w0.5: v1(56.152,88.011) 56.663,87.5 60.343,83.82 63.627,83.82 67.561,79.886 67.561,72.514 66.675,71.628 59.182,71.628 U3.13@57.912,72.898
  Top Layer w1: 56.663,87.5 C22.1@58.429,87.5
  Bottom Layer w1: R26.2@55.813,90.96 55.838,90.935 D6.2@58.472,90.935 ; v1(56.152,88.011) R26.2@56.152,90.621
NetC23_1: C23.1 D7.2 R28.2 U3.15 | length 41.9
  Top Layer w0.5: U3.15@57.912,67.818 59.182,66.548 66.548,66.548 68.261,68.261 68.261,80.329 61.287,87.303 v1(61.287,88.011)
  Top Layer w1: v1(61.287,88.011) 61.798,87.5 C23.1@63.536,87.5
  Bottom Layer w1: R28.2@60.931,90.96 60.956,90.935 D7.2@63.59,90.935 ; v1(61.287,88.011) R28.2@61.287,90.604
NetC24_1: C24.1 D8.2 R30.2 U3.17 | length 44.6
  Top Layer w0.5: U3.17@57.912,62.738 59.182,61.468 67.056,61.468 68.961,63.373 68.961,80.847 66.421,83.387 v1(66.421,88.011)
  Top Layer w1: 66.932,87.5 C24.1@68.644,87.5
  Bottom Layer w1: R30.2@66.048,90.579 66.073,90.554 D8.2@68.697,90.554 ; v1(66.421,88.011) R30.2@66.421,90.206
NetC27_1: C27.1 D25.2 pad.7 R55.2 U4.17 | length 46.9
  Top Layer w0.5: U4.17@120.65,62.738 121.92,61.468 133.858,61.468 134.744,60.582 134.744,55.502 144.526,45.72 144.526,41.275 145.796,40.005 pad.7@146.304,41.021
  Bottom Layer w1: pad.7@146.304,41.021 146.541,40.784 R55.2@149.38,40.784 149.355,40.759 D25.2@149.355,38.354
NetC28_1: C28.1 D26.2 pad.6 R53.2 U4.15 | length 48.2
  Top Layer w0.5: U4.15@120.65,67.818 125.984,67.818 127.254,66.548 135.001,66.548 135.444,66.105 135.444,55.945 146.304,45.085 C28.1@146.304,43.419
  Bottom Layer w1: pad.6@146.304,44.958 149.355,44.958 ; D26.2@149.355,43.413 149.355,44.958 ; R53.2@149.38,45.843 149.355,45.818 149.355,44.958
NetC29_1: C29.1 D27.2 pad.5 R51.2 U4.13 | length 50.2
  Top Layer w0.5: U4.13@120.65,72.898 121.92,71.628 134.874,71.628 136.144,70.358 136.144,56.515 142.621,50.038 pad.5@146.304,50.038 C29.1@146.304,48.481
  Bottom Layer w1: pad.5@146.431,49.911 149.355,49.911 ; D27.2@149.355,48.473 149.355,49.911 ; R51.2@149.38,50.903 149.355,50.878 149.355,49.911
NetC30_1: C30.1 D28.2 pad.4 R49.2 U4.11 | length 52.8
  Top Layer w0.5: U4.11@120.65,77.978 121.92,76.708 135.382,76.708 136.906,75.184 136.906,57.15 138.938,55.118 pad.4@146.304,55.118 C30.1@146.304,53.543
  Bottom Layer w1: pad.4@146.304,55.118 149.355,55.118 ; D28.2@149.355,53.532 149.355,55.118 ; R49.2@149.38,55.962 149.355,55.937 149.355,55.118
NetC31_1: C31.1 D29.2 pad.3 R47.2 U4.8 | length 39.5
  Top Layer w0.5: C31.1@146.304,58.604 pad.3@146.304,60.198
  Top Layer w0.7: v1(140.081,72.898) 138.811,71.628 138.811,60.198 pad.3@146.304,60.198
  Bottom Layer w1: U4.8@128.27,72.898 v1(140.081,72.898) ; pad.3@146.431,60.071 149.355,60.071 ; D29.2@149.355,58.592 149.355,60.071 ; R47.2@149.38,61.022 149.355,60.997 149.355,60.071
NetC32_1: C32.1 D30.2 pad.2 R45.2 U4.6 | length 26.1
  Top Layer w0.5: C32.1@146.304,63.666 pad.2@146.304,65.278
  Top Layer w1: v1(140.97,67.818) 143.256,67.818 145.796,65.278 pad.2@146.304,65.278
  Bottom Layer w1: U4.6@128.27,67.818 v1(140.97,67.818) ; pad.2@146.431,65.151 149.355,65.151 ; D30.2@149.355,63.651 149.355,65.151 ; R45.2@149.38,66.081 149.355,66.056 149.355,65.151
NetC33_1: C33.1 D31.2 pad.1 R43.2 U4.4 | length 33.1
  Top Layer w0.5: C33.1@146.177,68.849 pad.1@146.177,70.358
  Top Layer w0.7: v1@139.954,62.738 139.785,62.907 139.785,70.062 140.081,70.358 pad.1@146.177,70.358
  Bottom Layer w1: U4.4@128.27,62.738 v1@140.335,62.738 ; pad.1@146.177,70.358 149.355,70.358 ; D31.2@149.355,68.711 149.355,70.358 ; R43.2@149.38,71.141 149.355,71.116 149.355,70.358
  other v1: 140.335,62.611
NetC34_1: C34.1 D32.2 pad.0@146.304,75.438 R41.2 U4.2 | length 42.6
  Top Layer w0.5: C34.1@146.304,73.79 pad.0@146.304,75.438
  Top Layer w0.7: 137.922,74.168 137.761,74.007 137.761,58.835 v1@138.43,58.166
  Top Layer w1: 137.922,74.168 139.192,75.438 pad.0@146.304,75.438
  Bottom Layer w1: U4.2@128.27,57.658 v1(138.557,57.658) ; pad.0@146.431,75.311 149.355,75.311 ; D32.2@149.355,73.77 149.355,75.311 ; R41.2@149.38,76.2 149.355,76.175 149.355,75.311
NetC35_1: C35.1 D17.2 pad.15 R42.2 U5.2 | length 67
  Top Layer w0.5: U5.2@107.357,57.658 106.087,58.928 97.409,58.928 95.563,60.774 95.563,79.229 99.138,82.804 110.62,82.804 113.993,86.177 118.937,86.177 119.888,87.128 C35.1@119.888,88.008 ; C35.1@119.891,88.011 pad.15@121.285,88.011
  Bottom Layer w1: D17.2@119.888,91.062 119.913,91.087 121.285,91.087 ; pad.15@121.285,88.011 121.285,91.087 ; R42.2@122.428,91.087 121.285,91.087
NetC36_1: C36.1 D18.2 pad.14 R44.2 U5.4 | length 64.7
  Top Layer w0.5: U5.4@107.357,62.738 106.017,64.078 99.24,64.078 98.537,64.781 98.537,64.785 96.393,66.929 96.393,79.069 99.366,82.042 110.848,82.042 114.283,85.477 123.636,85.477 124.968,86.809 C36.1@124.968,88.008 ; C36.1@124.971,88.011 pad.14@126.492,88.011
  Bottom Layer w1: D18.2@124.968,91.062 124.993,91.087 126.365,91.087 ; pad.14@126.365,88.138 126.365,91.087 ; R44.2@127.381,91.087 126.365,91.087
NetC37_1: C37.1 D19.2 pad.13 R46.2 U5.6 | length 64.4
  Top Layer w0.5: U5.6@107.357,67.818 106.087,69.088 98.679,69.088 97.155,70.612 97.155,78.841 99.594,81.28 111.076,81.28 114.573,84.777 128.843,84.777 130.048,85.982 C37.1@130.048,88.008 ; C37.1@130.178,88.138 pad.13@131.572,88.138
  Bottom Layer w1: D19.2@130.048,91.062 130.073,91.087 131.572,91.087 ; pad.13@131.572,88.138 131.572,91.087 ; R46.2@132.588,91.087 131.572,91.087
NetC38_1: C38.1 D20.2 pad.12 R48.2 U5.8 | length 63.3
  Top Layer w0.5: U5.8@107.357,72.898 106.087,74.168 99.31,74.168 97.917,75.561 97.917,78.613 99.822,80.518 111.304,80.518 114.863,84.077 133.669,84.077 135.001,85.409 C38.1@135.001,88.008 ; C38.1@135.004,88.011 pad.12@136.652,88.011
  Bottom Layer w1: D20.2@135.001,90.973 135.026,90.998 136.652,90.998 ; pad.12@136.652,88.011 136.652,90.998 ; R48.2@137.541,90.998 136.652,90.998
NetC39_1: C39.1 D21.2 pad.11 R50.2 U5.11 | length 53.7
  Top Layer w0.5: U5.11@99.737,77.978 101.007,76.708 108.484,76.708 115.153,83.377 137.225,83.377 140.208,86.36 C39.1@140.208,88.008 ; C39.1@140.332,87.884 pad.11@141.732,87.884
  Bottom Layer w1: D21.2@140.208,90.973 140.233,90.998 141.732,90.998 ; pad.11@141.732,87.884 141.732,90.998 ; R50.2@142.748,90.998 141.732,90.998
NetC40_1: C40.1 D22.2 pad.10 R52.2 U5.13 | length 64.9
  Top Layer w0.5: U5.13@99.737,72.898 101.007,71.628 108.585,71.628 109.155,72.198 109.155,76.389 115.443,82.677 139.319,82.677 144.65,88.008 C40.1@145.288,88.008
  Bottom Layer w1: pad.10@141.732,85.217 145.415,88.9 D22.2@145.415,90.973 145.44,90.998 R52.2@147.701,90.998
NetC41_1: C41.1 D23.2 pad.9 R54.2 U5.15 | length 68.5
  Top Layer w0.5: U5.15@99.737,67.818 101.007,66.548 108.458,66.548 109.855,67.945 109.855,76.073 115.697,81.915 142.875,81.915 144.78,83.82 C41.1@146.301,83.82 ; C41.1@146.177,83.693 pad.9@146.177,82.423 146.304,83.82 C41.1@146.304,83.823
  Bottom Layer w1: pad.9@146.177,82.423 147.574,83.82 D23.2@149.736,83.82 149.736,86.462 R54.2@149.761,86.487
NetC42_1: C42.1 D24.2 pad.8 R56.2 U5.17 | length 72.1
  Top Layer w0.5: U5.17@99.737,62.738 101.007,61.468 110.236,61.468 112.014,63.246 112.014,77.216 115.951,81.153 142.748,81.153 145.161,78.74 146.273,78.74 C42.1@146.301,78.768 ; C42.1@146.177,78.836 pad.8@146.177,80.391
  Bottom Layer w1: pad.8@146.177,80.391 149.736,80.391 ; D24.2@149.736,78.613 149.736,80.391 ; R56.2@149.736,81.128 149.736,80.391
NetC51_2: C51.2 R81.1 U18.3 | length 6
  Bottom Layer w1: U18.3@196.469,112.776 197.104,112.776 198.377,111.503 C51.2@199.009,111.503 R81.1@199.009,108.546